# EAGLE board ultraino44 (EAGLE 8.3.2)
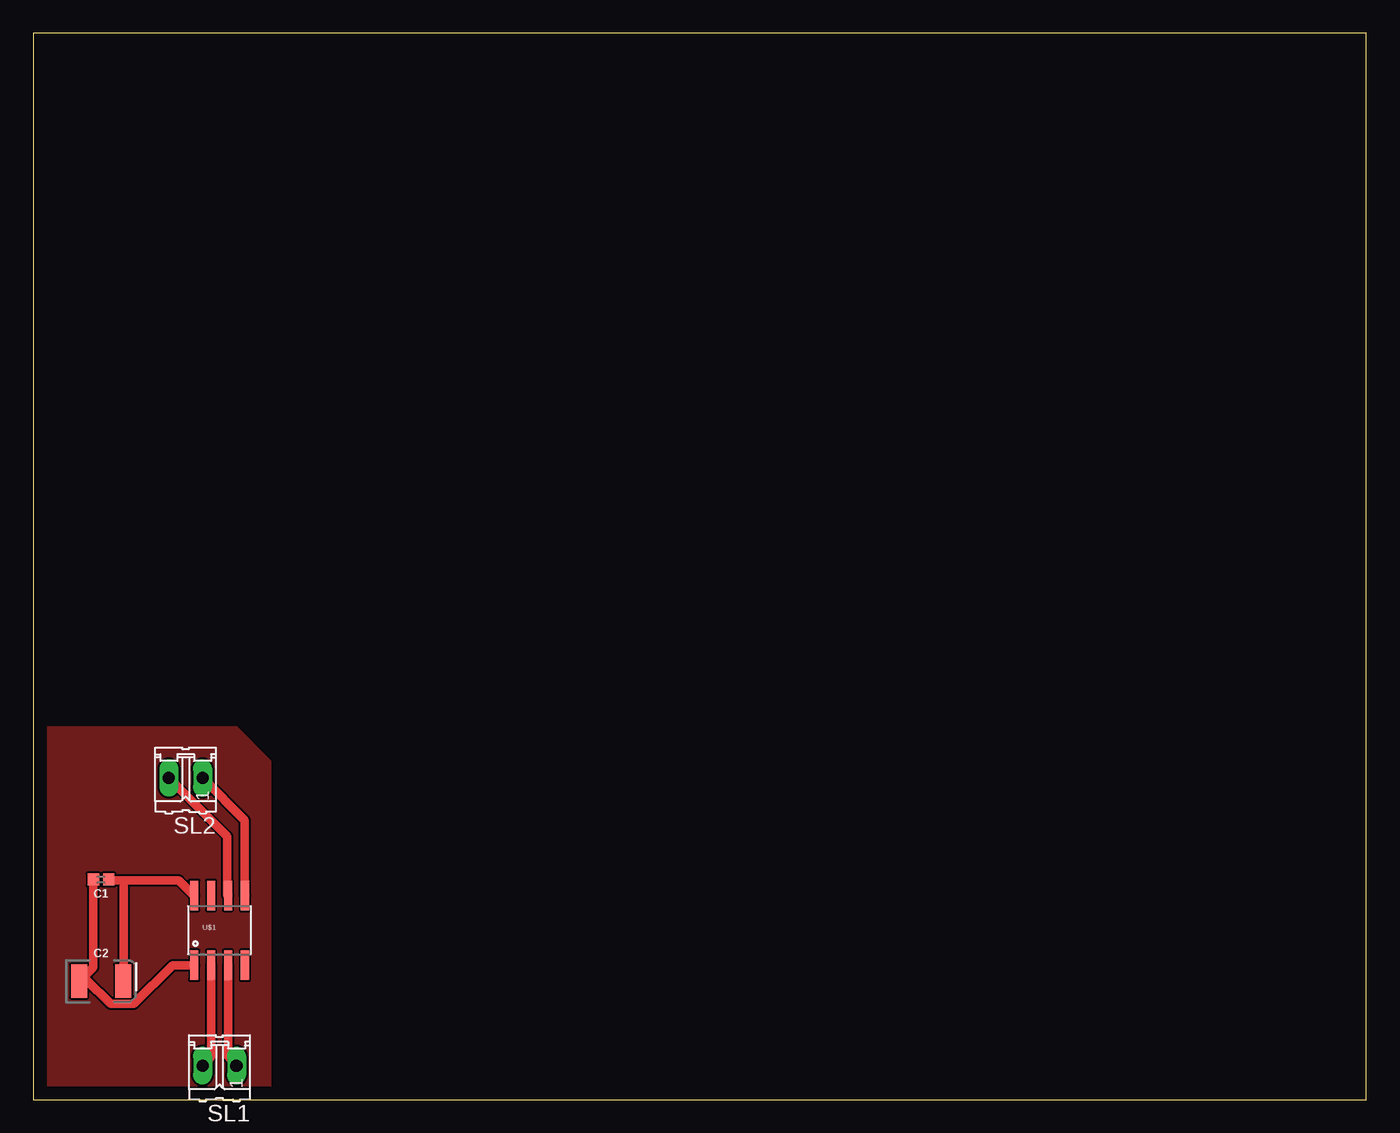
[diagram p0: board, top side]

Size 100 x 80 mm. Coordinates in mm from the lower left corner, seen from the top.
Outline: 0,0 100,0 100,80 0,80 0,0
Copper layers (1*16): Top 0.035mm / dielectric 1.5mm / Bottom 0.035mm
Design rules "default": minimum track width 6mil, minimum drill 0.35mm, track to track 6mil, track to pad 6mil, pad to pad 6mil, via to via 6mil, smd to smd 6mil, copper to edge 40mil, drill to drill 6mil, minimum pad ring 10mil, minimum via ring 8mil, stop-mask expansion 4mil, vias tented up to drill 0mil, thermal gap 10mil
Net classes: 1 GND: width 0.635 mm

## Footprints (pad centres in the part's own frame; a part is rotated, then mirrored left to right if it is on the bottom)
0402 = smd 0.85 x 0.9: 1 -0.58,0; 2 0.58,0
EIA3528 = smd 1.2 x 2.5: A 1.65,0; C -1.65,0
02P = drill 0.914 long: 1 -1.27,0; 2 1.27,0
SOIC-8 = smd 0.61 x 2.21: 1 -1.905,-2.616; 2 -0.635,-2.616; 3 0.635,-2.616; 4 1.905,-2.616; 5 1.905,2.616; 6 0.635,2.616; 7 -0.635,2.616; 8 -1.905,2.616

## Placement (x,y rotation side)
C1  0.1uF  [0402]  5.08,16.51 180 top
C2  47uF  [EIA3528]  5.08,8.89 0 top
SL1  [02P]  13.97,2.54 180 top
SL2  [02P]  11.43,24.13 180 top
U$1  TC4427  [SOIC-8]  13.97,12.7 0 top

## Library data of the parts
C1 = capacitor; PROD_ID: CAP-12416
C2 = capacitor; PROD_ID: CAP-08310
SL1 SL2 = con-amp-quick; OC_FARNELL: unknown; OC_NEWARK: unknown
U$1 = example

## Nets
GND [GND]: C1.1 C2.A U$1.8
N$1 [GND]: SL1.2 U$1.2
N$2 [GND]: SL1.1 U$1.3
N$3 [GND]: SL2.1 U$1.5
N$4 [GND]: SL2.2 U$1.6
VCC [GND]: C1.2 C2.C U$1.1

## Tracks (layer width: path | path; a pad name or v marks a point on that pad's centre or on a via)
GND
  Top 0.635: 6.78,16.46 10.9,16.46 12.04,15.32 U$1.8 | 6.78,16.46 5.71,16.46 C1.1 | 6.78,16.46 6.78,8.91 C2.A
N$1
  Top 0.635: U$1.2 13.34,3.2 12.72,2.59 SL1.2
N$2
  Top 0.635: U$1.3 14.63,10.06 14.63,3.2 15.24,2.59 SL1.1
N$3
  Top 0.635: U$1.5 15.85,15.32 15.85,20.95 12.72,24.08 SL2.1
N$4
  Top 0.635: SL2.2 14.55,19.74 14.55,15.32 U$1.6
N$5
  pour Top: 0,27.94 15.24,27.94 17.78,25.4 17.78,0 0,0
VCC
  Top 0.635: C1.2 4.5,16.46 4.5,9.91 3.5,8.91 C2.C 3.96,8.99 5.79,7.16 7.54,7.16 10.44,10.06 12.04,10.06 U$1.1